# Altium PCB PCB.PcbDoc (part 1 of 3)
Units mm, origin at the board's own origin, x right, y up, seen from the top; angles counter-clockwise.
Board outline 200 x 125 mm, 2 copper layers (Top Layer, Bottom Layer), stack 1.56 mm thick; 156 components, 82 nets, 479 pads, 136 vias.
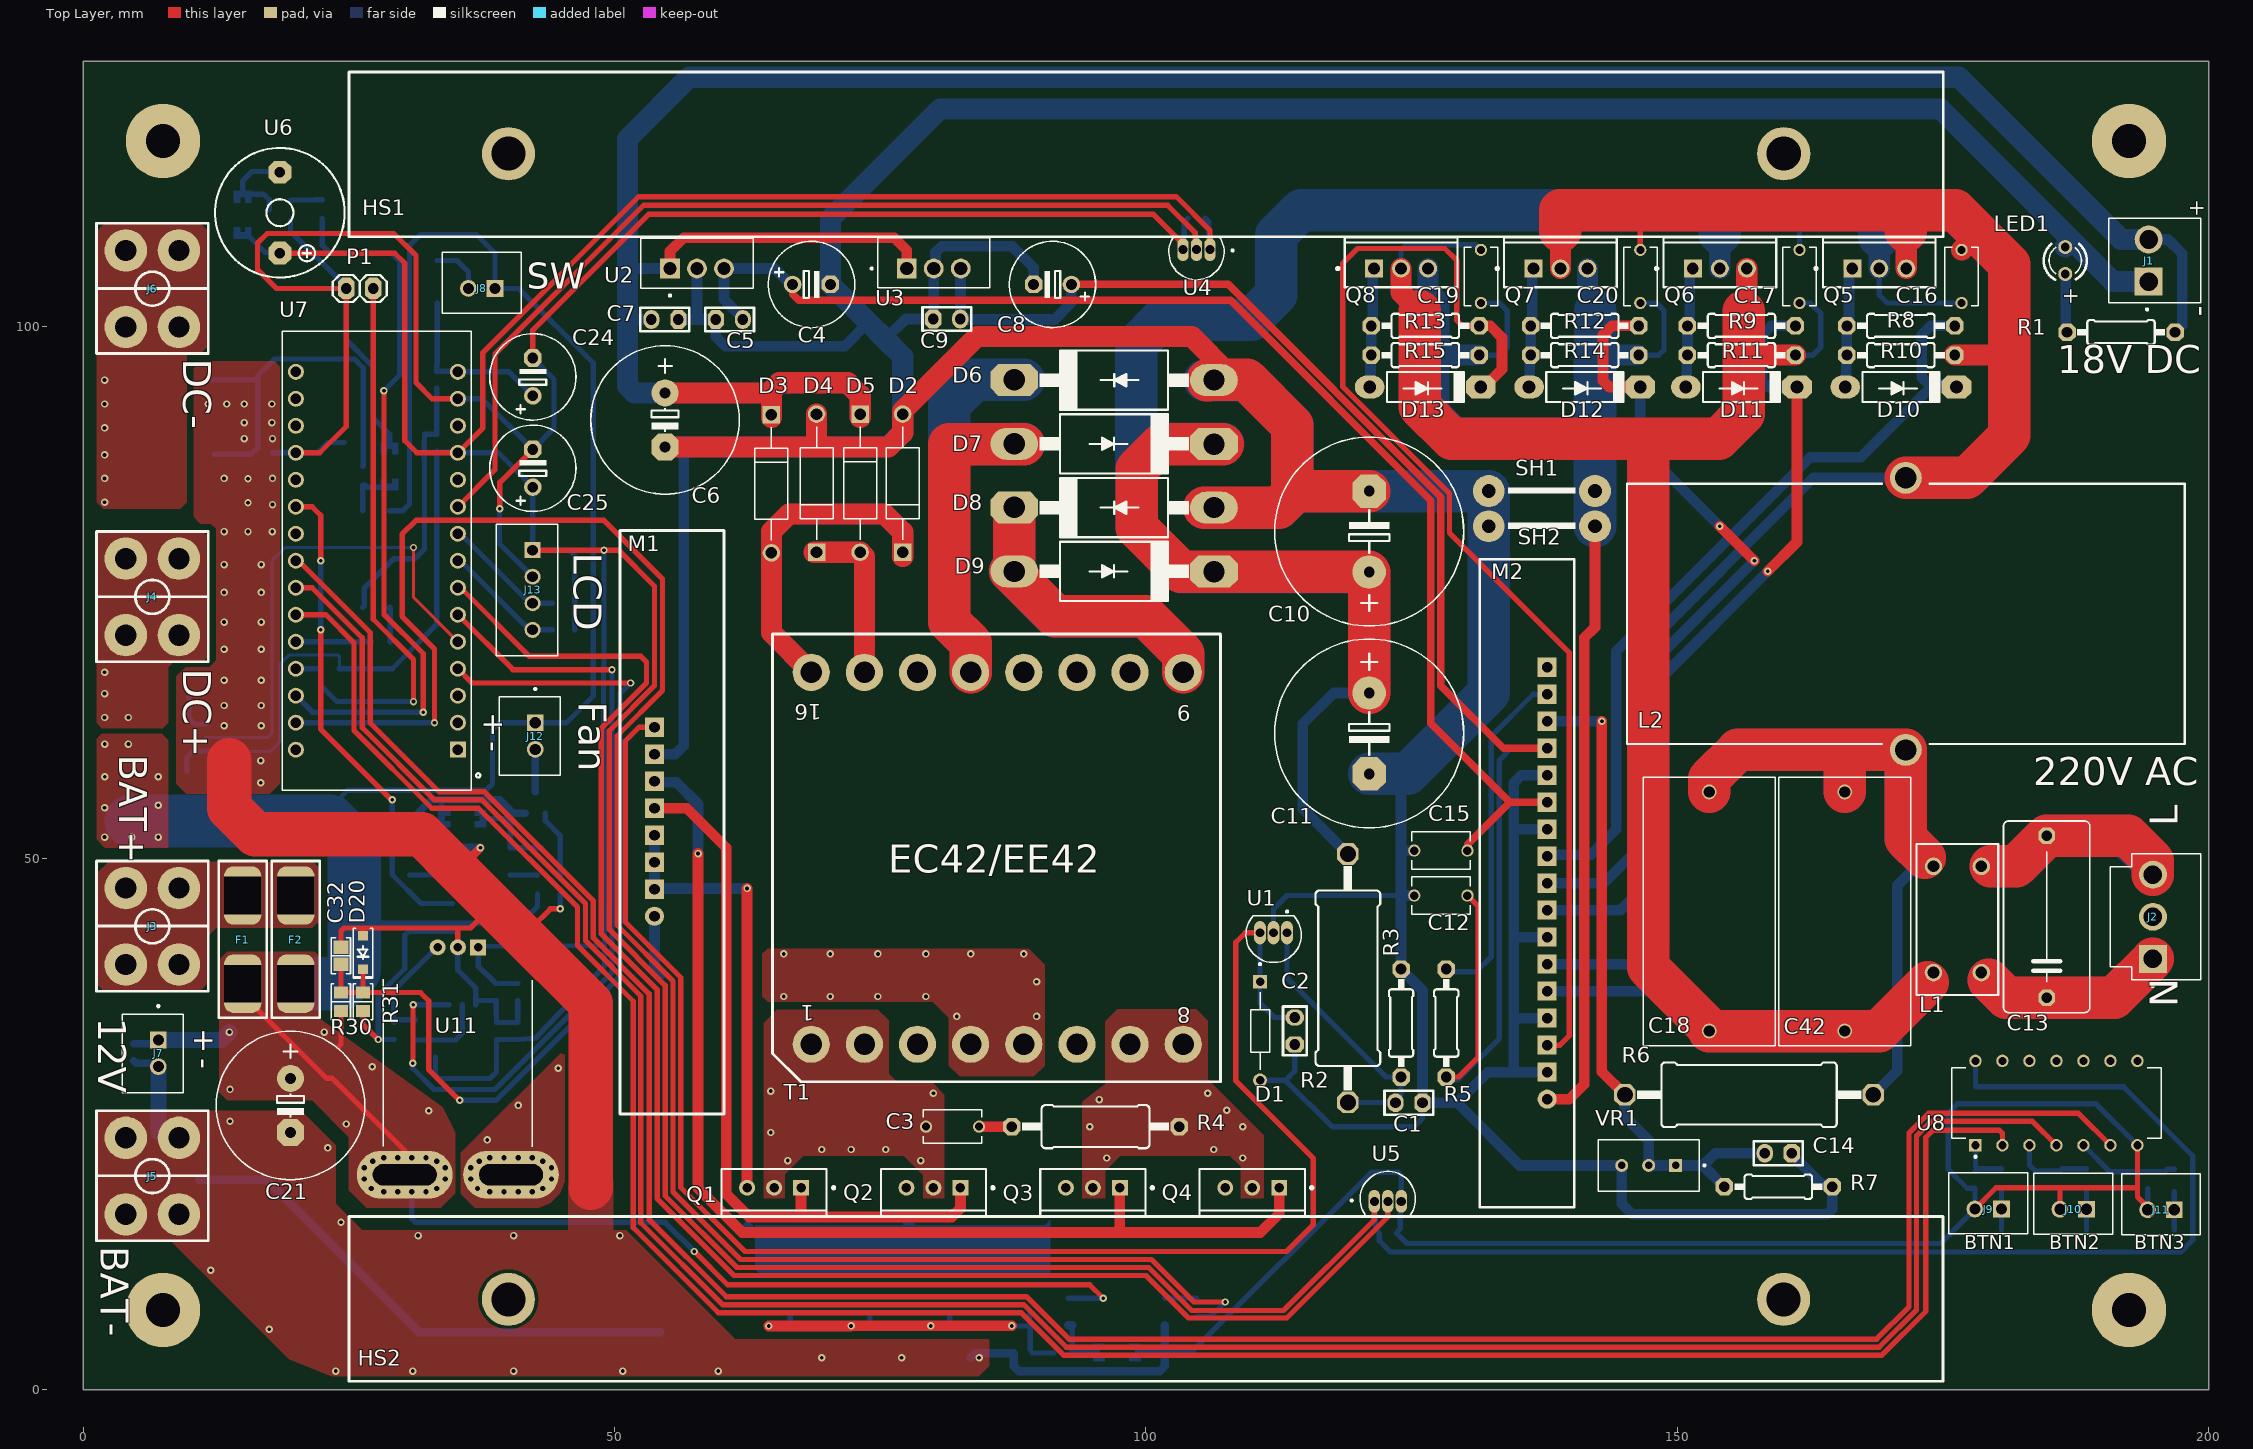
[diagram p0: Top Layer view]
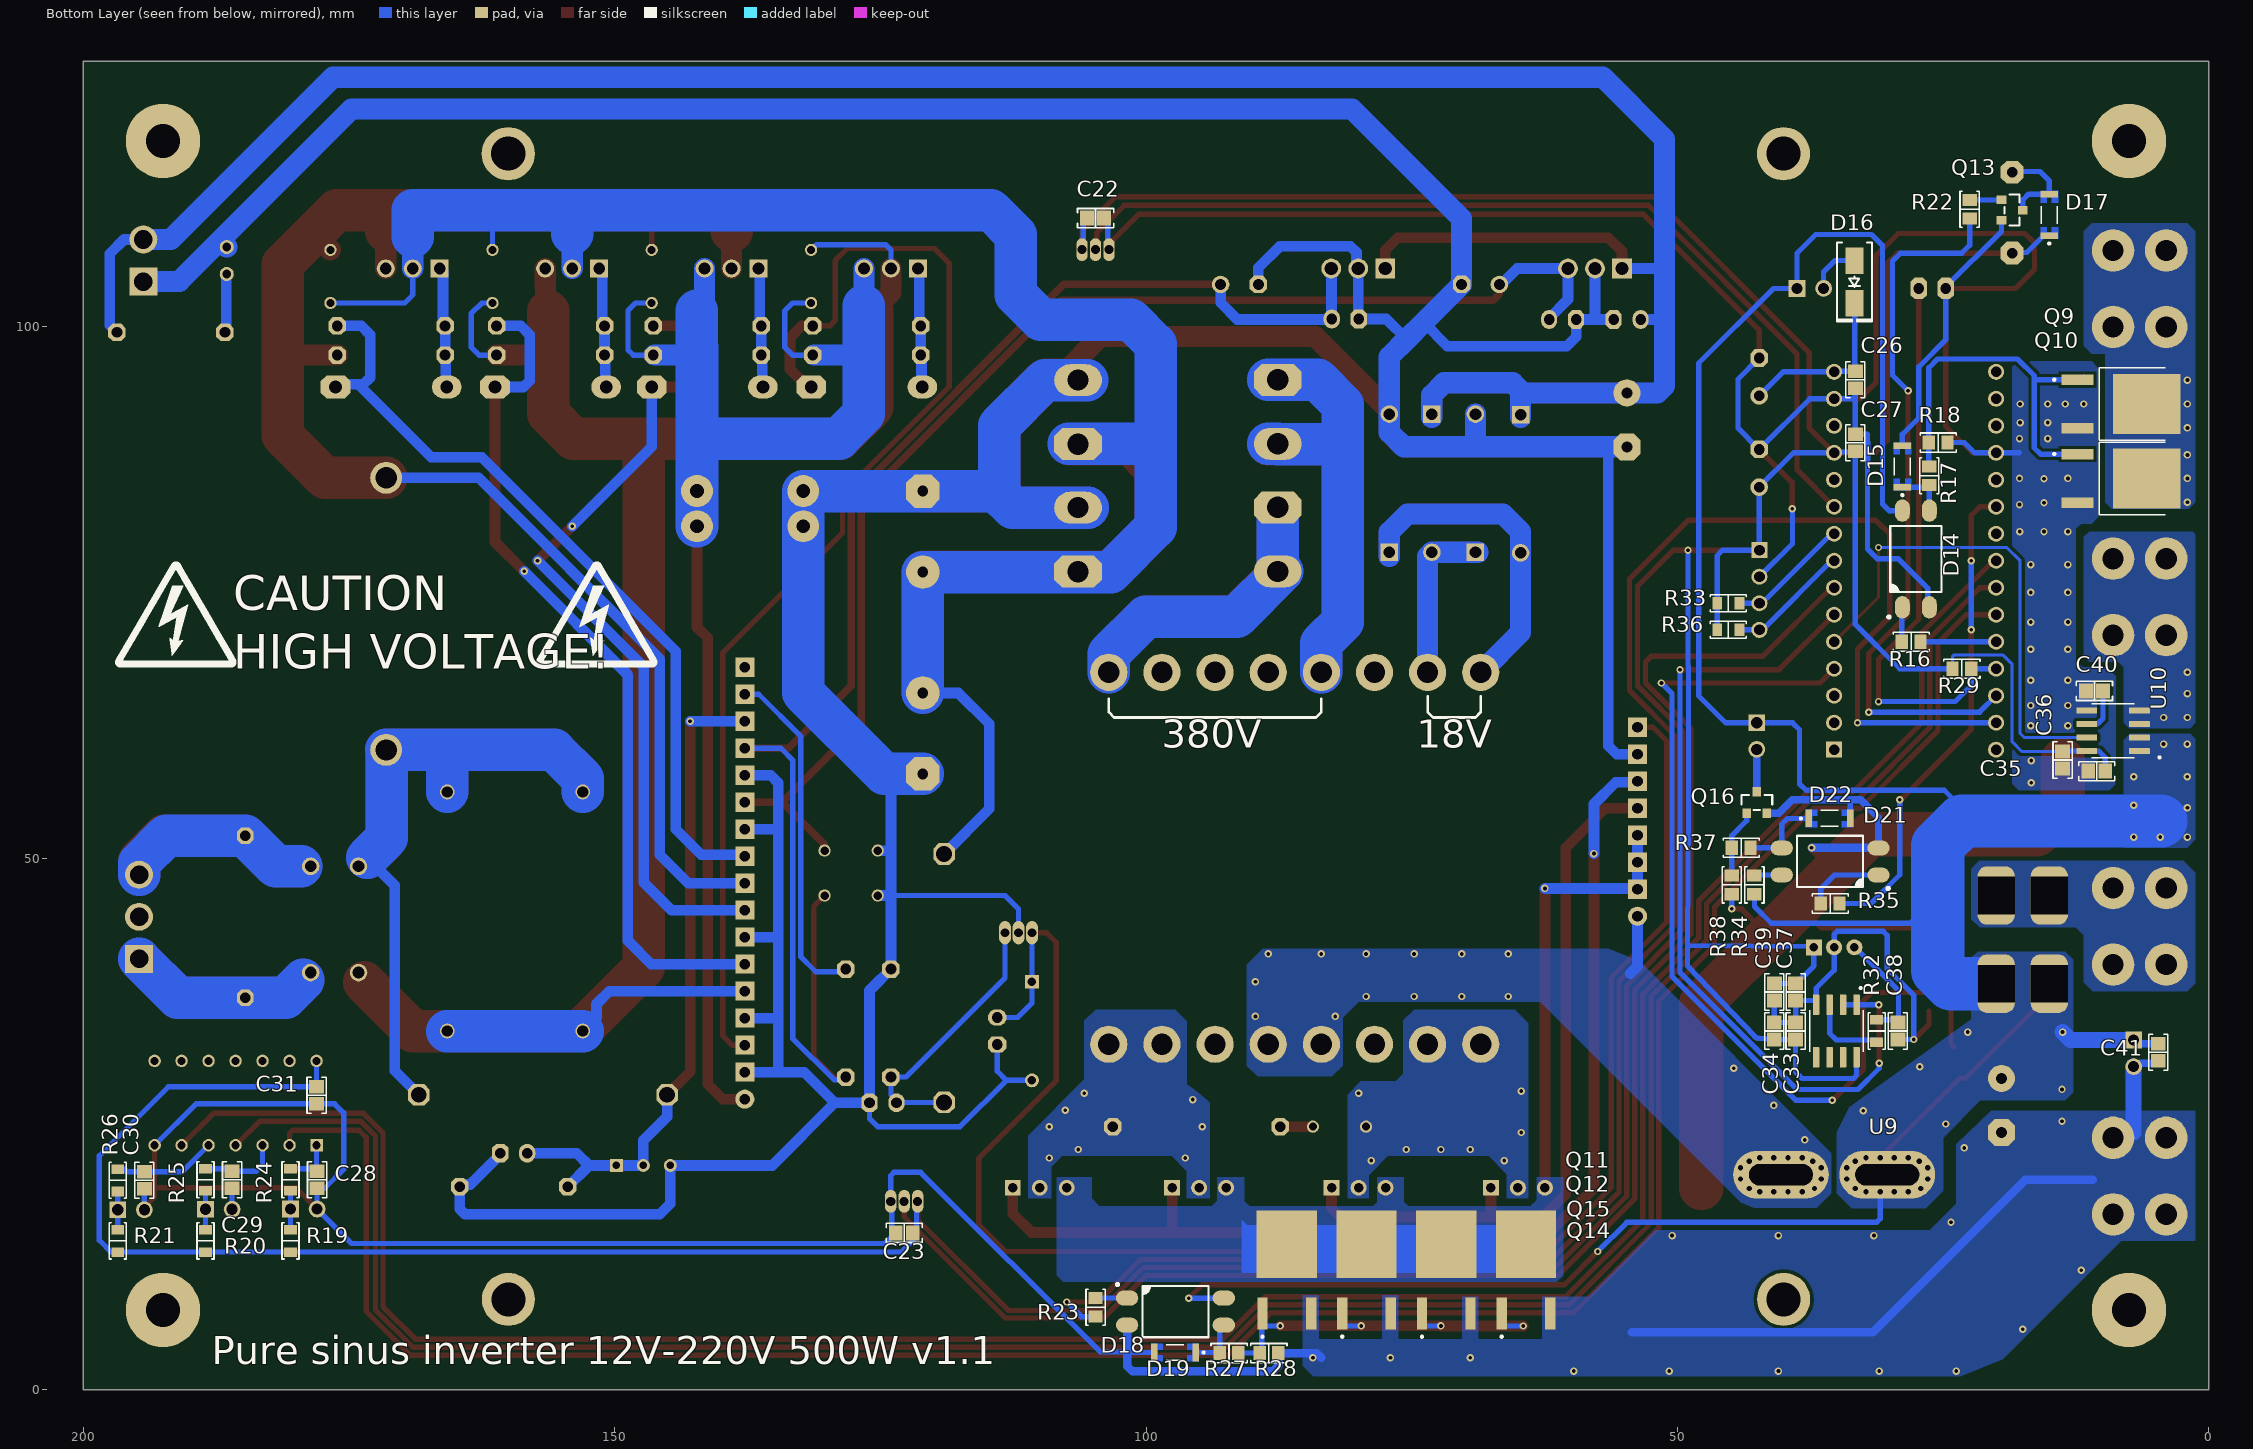
[diagram p1: Bottom Layer view, seen from below]
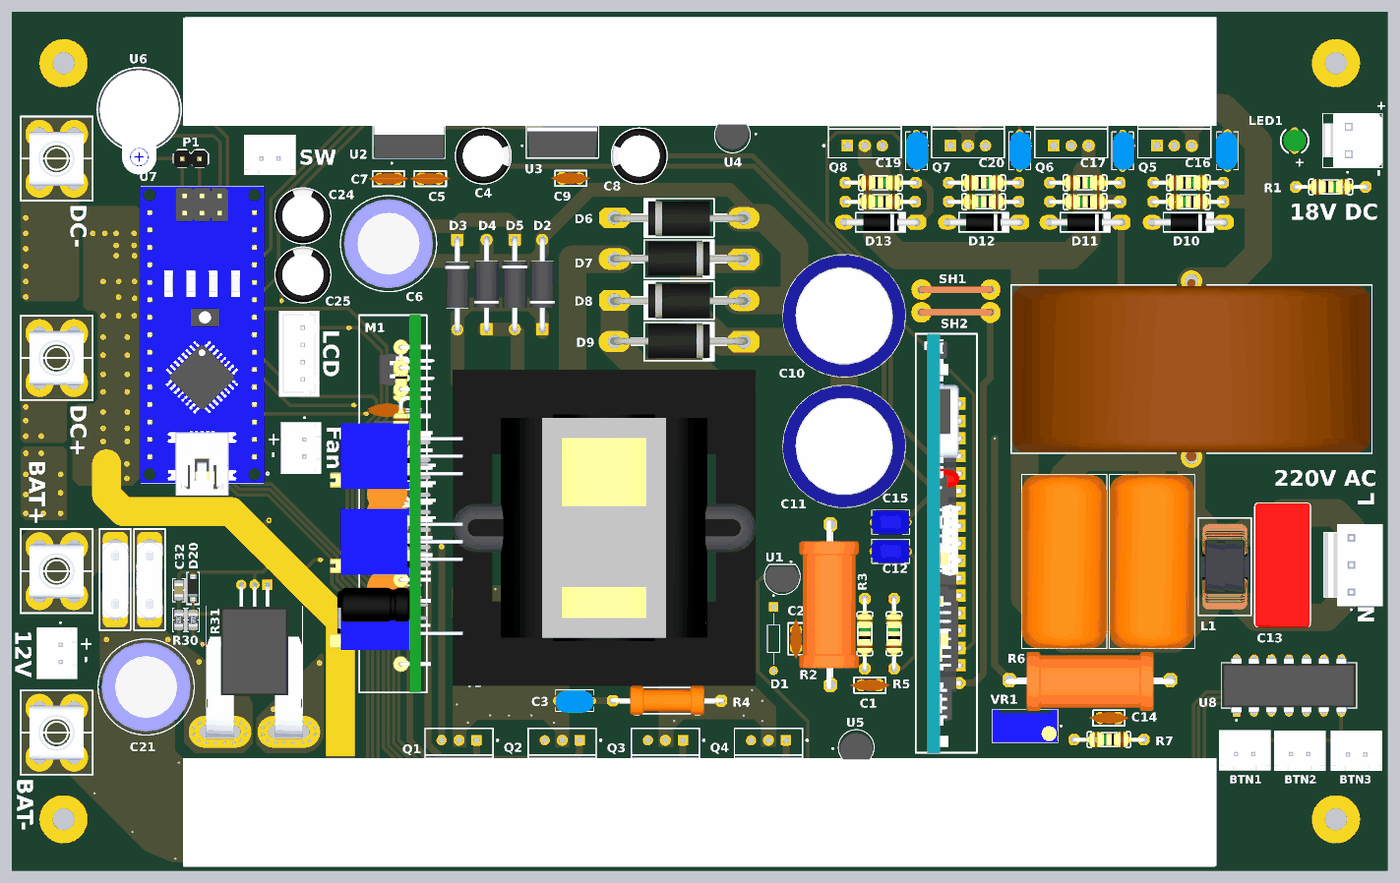
[diagram p3: 3D render of the assembled board from above, using the file's embedded part models]
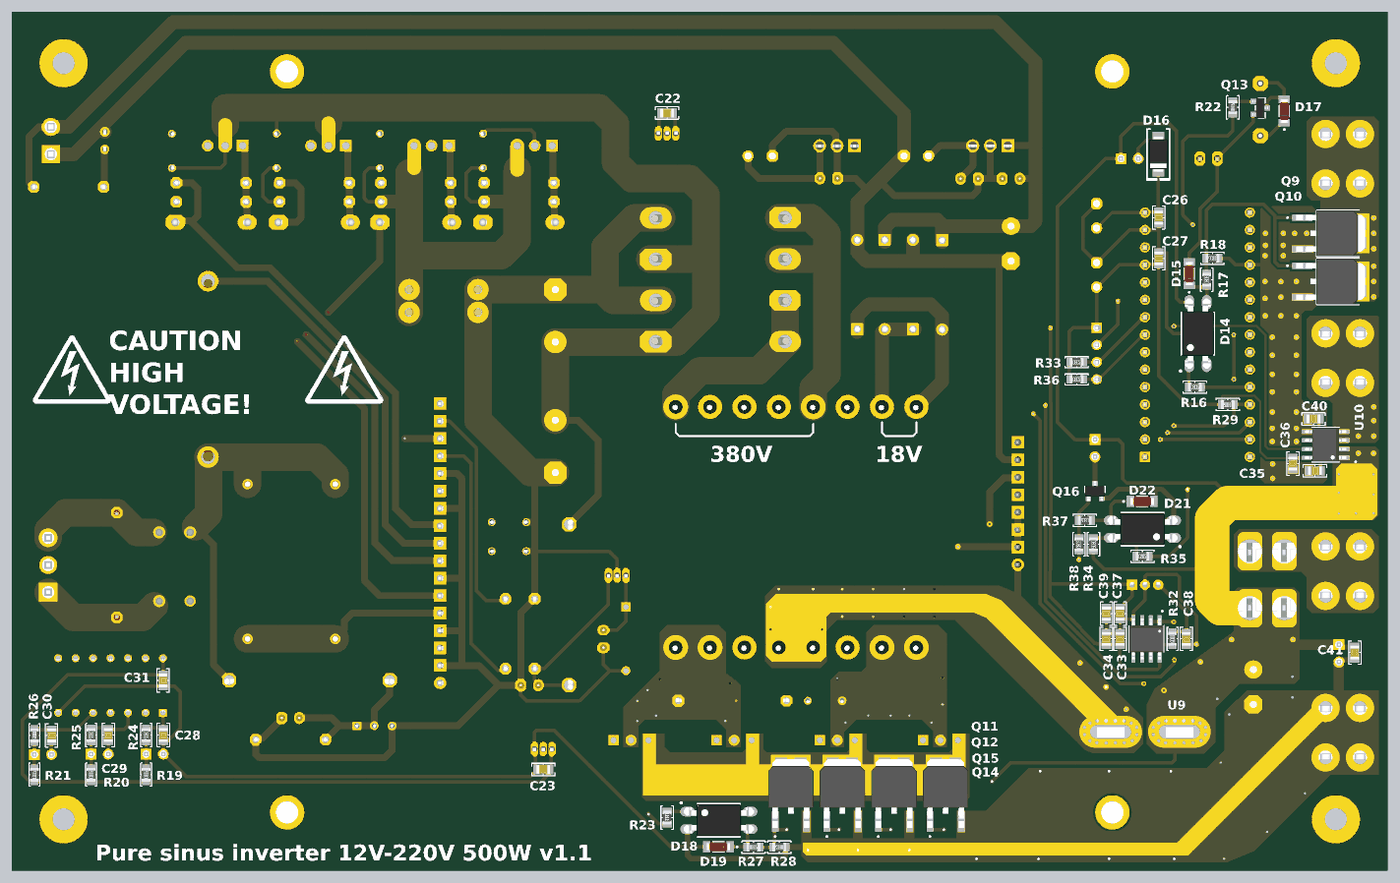
[diagram p4: 3D render of the assembled board from below, using the file's embedded part models]

## Layer stack, top to bottom
Top Solder: solder mask 0.02, Solder Resist, Dk 3.5
Top Layer: signal copper 0.03
Dielectric 1: dielectric 1.5, FR-4, Dk 4.8
Bottom Layer: signal copper 0.03
Bottom Solder: solder mask 0.02, Solder Resist, Dk 3.5

## Board outline
0,0 0,125 200,125 200,0

## Design rules (kind name [scope] priority, off if disabled: settings)
AcuteAngle [All] p1: minimum=6.00000000000000E+0001 checktracksonly=TRUE
AssemblyTestPointUsage [(not InNetClass('NOTESTPOINTS'))] p1: allowmultiple=TRUE
AssemblyTestPointUsage AssemblyTestPointUsageN [InNetClass('NOTESTPOINTS')] p2: valid=2 allowmultiple=TRUE
AssemblyTestpoint [All] p1: testpointundercomponent=TRUE minsize=0.8 maxsize=2 preferedsize=1 minholesize=0 maxholesize=0.35 preferedholesize=0 testpointgrid=1.27 usegrid=FALSE gridoriginx=87.5 gridoriginy=62.5 gridtolerance=0 allowsidetop=TRUE minspacing=2.54 // Zollner
BoardOutlineClearance BoardCopperOutlineClearance [(OnLayer('Top Layer') OR OnLayer('Bottom Layer') )] p1: gap=0.5 ignorepadtopadclearanceinfootprint=FALSE except(1: Poly-OutlineEdge Region-OutlineEdge; 1.5: SMDPad-OutlineEdge THPad-OutlineEdge)
Clearance PadToViaClearance [IsVia and not IsComponentVia vs IsPad] p1: gap=0.025 ignorepadtopadclearanceinfootprint=TRUE
Clearance "Clearance NOTSELV-SELV" [InNetClass('NOTSELV') vs NOT InNetClass('NOTSELV')] p2: gap=6 ignorepadtopadclearanceinfootprint=FALSE // according to previous calio PCB
Clearance "Clearance (FAB)" [All] p3: gap=0.203 ignorepadtopadclearanceinfootprint=TRUE except(0.305: Arc-Poly Track-Poly SMDPad-Poly THPad-Poly Via-Poly Fill-Poly; 0.5: Poly-Poly)
ComponentClearance ComponentClearance_NetTie [((ObjectKind = 'Component') And (ComponentType = 'Net Tie')) Or (Footprint = 'StarPoint') Or (Footprint like 'NetTieVia*')] p1: gap=-3.81 collisioncheckmode=3 verticalgap=-3.81 showdistances=FALSE
ComponentClearance [All] p2: gap=0 collisioncheckmode=3 verticalgap=0 showdistances=FALSE
DiffPairsRouting [All] p1: maxlimit=1.27 minlimit=0.203 mostfreqgap=0.203 toplayer_minwidth=0.152 toplayer_maxwidth=2.54 toplayer_prefwidth=0.254 bottomlayer_minwidth=0.152 bottomlayer_maxwidth=2.54 bottomlayer_prefwidth=0.254 maxuncoupledlength=12.7
FabricationTestPointUsage [All] p1: valid=2 allowmultiple=FALSE
FabricationTestpoint [All] p1: side=3 testpointundercomponent=TRUE minsize=1.016 maxsize=2.54 preferedsize=1.524 minholesize=0 maxholesize=1.016 preferedholesize=0.813 testpointgrid=0.025 allowsidetop=TRUE allowsidebottom=TRUE usegrid=FALSE gridtolerance=0
Height [All] p1: minheight=0 maxheight=65.4 prefheight=12.7
HoleSize [All] p1: absolutevalues=TRUE maxlimit=6.35 minlimit=0.3 maxpercent=80.000 minpercent=20.000 // Zollner
HoleToHoleClearance HoleToHoleClearance_NetTieVia [InPadClass('NetTieVias') vs InPadClass('NetTieVias')] p1: gap=0 allowstackedmicrovias=TRUE
HoleToHoleClearance [All] p2: gap=0.25 allowstackedmicrovias=TRUE // Zollner
MinimumAnnularRing [All] p1: minimumring=0.15 // PCBWAY
MinimumSolderMaskSliver [All] p1: minsoldermaskwidth=0.2 // Zollner
PlaneClearance PlaneClearance_1 [All] p1: clearance=0.508
PlaneConnect [All] p1: pad.planeconnectstyle=Relief pad.reliefexpansion=0.508 pad.reliefentries=4 pad.reliefconductorwidth=0.254 pad.reliefairgap=0.254 via.planeconnectstyle=Direct via.reliefexpansion=0.508 via.reliefentries=4 via.reliefconductorwidth=0.254 via.reliefairgap=0.254
PolygonConnect [All] p1: connectstyle=Direct reliefconductorwidth=0.254 reliefentries=4 polygonreliefangle="90 Angle" airgapwidth=0.254
RoutingVias [All] p1: holewidth=0.35 width=0.7 viastyle="Through Hole" minholewidth=0.3 minwidth=0.6 maxholewidth=1.27 maxwidth=1.27
SMDEntry [not IsTestpoint] p1: side=TRUE corner=TRUE anyangle=FALSE
SMDNeckDown [not IsTestpoint] p1: percent=90.000
SMDToCorner [All] p1: distance=10000
SMDToPlane [All] p1: distance=0
ShortCircuit [All vs not IsBoardCutoutRegion] p1: allowed=FALSE
SilkToSolderMaskClearance [IsPad] p1: minsilkscreentomaskgap=0.127 clearancetoexposedcopper=TRUE
SolderMaskExpansion [All] p1: expansion=0.05 istentingtop=FALSE // Zollner
SolderMaskExpansion SolderMaskExpansionToHoles [All] p2: expansion=0.1 istentingtop=FALSE soldermaskfromhole=TRUE // Zollner
SupplyNets "Schematic Supply Nets_17" [InNet('VIN')] p1: voltage=0.000
SupplyNets "Schematic Supply Nets_16" [InNet('+5_SEC')] p2: voltage=0.000
SupplyNets "Schematic Supply Nets_15" [InNet('18VAC+')] p3: voltage=0.000
SupplyNets "Schematic Supply Nets_14" [InNet('18VAC-')] p4: voltage=0.000
SupplyNets "Schematic Supply Nets_13" [InNet('380VAC+')] p5: voltage=0.000
SupplyNets "Schematic Supply Nets_12" [InNet('+12_SEC')] p6: voltage=0.000
SupplyNets "Schematic Supply Nets_11" [InNet('+5')] p7: voltage=0.000
SupplyNets "Schematic Supply Nets_10" [InNet('SHT')] p8: voltage=0.000
SupplyNets "Schematic Supply Nets_9" [InNet('+18_SEC')] p9: voltage=0.000
SupplyNets "Schematic Supply Nets_8" [InNet('+380_SEC')] p10: voltage=0.000
SupplyNets "Schematic Supply Nets_7" [InNet('GND')] p11: voltage=0.000
SupplyNets "Schematic Supply Nets_6" [InNet('+12')] p12: voltage=0.000
SupplyNets "Schematic Supply Nets_5" [InNet('DC_LOAD_VCC')] p13: voltage=0.000
SupplyNets "Schematic Supply Nets_4" [InNet('380VAC-')] p14: voltage=0.000
SupplyNets "Schematic Supply Nets_3" [InNet('GND_PRI')] p15: voltage=0.000
SupplyNets "Schematic Supply Nets_2" [InNet('GND_SEC')] p16: voltage=0.000
SupplyNets "Schematic Supply Nets_1" [InNet('DC_LOAD_GND')] p17: voltage=0.000
SupplyNets "Schematic Supply Nets" [InNet('+12_PRI')] p18: voltage=0.000
UnRoutedNet [All] p1: checkbadconnections=TRUE
Width [All] p1: maxlimit=12.7 minlimit=0.203 preferedwidth=0.254
15 further rules are at their usual default settings.

## Components (designator, comment, footprint, x,y, rotation, side; value= is the part's Value field where it differs from the comment)
C1 "100nF" My_cap100n 124.75,27 r180 top
C2 "100nF" My_cap100n 114,33.75 r90 top
C3 "10nF 1kV" CAP_RDER73A103K2K1H03B 81.793,24.75 r0 top
C4 "470uF" MY_E3.5-8mm 68.528,104 r0 top
C5 "100nF" My_cap100n 60.8,100.7 r0 top locked
C6 "1000uF" MY_E5-13mm 54.75,91.25 r270 top
C7 "100nF" My_cap100n 54.73,100.7 r180 top locked
C8 "470uF" MY_E3.5-8mm 91.2,104 r180 top
C9 "100nF" My_cap100n 81.25,100.75 r0 top
C10 "100uF" MY_E7.5-18mm 121,80.75 r90 top
C11 "100uF" MY_E7.5-18mm 121,61.75 r270 top
C12 "10uF 25V" CAPRB500W50L550T350H600 127.75,46.5 r0 top
C13 "100nF" MY_E8.4-15mm 184.75,44.5 r90 top
C14 "100nF" My_cap100n 159.5,22.25 r180 top
C15 "10uF 25V" CAPRB500W50L550T350H600 127.75,50.729 r0 top
C16 "1nF 1kV" CAP_RDER73A103K2K1H03B 176.75,104.75 r270 top
C17 "1nF 1kV" CAP_RDER73A103K2K1H03B 161.5,104.75 r90 top
C18 "2.2uF 630V" CAPRR2250W80L2530T1240H1770 153,45 r90 top
C19 "1nF 1kV" CAP_RDER73A103K2K1H03B 131.51,104.75 r90 top
C20 "1nF 1kV" CAP_RDER73A103K2K1H03B 146.51,104.75 r90 top
C21 "2200uF" MY_E5-13mm 19.5,26.75 r270 top
C22 "0.1µF" "CAP 0805_2012" 104.75,110.25 r0 bottom
C23 "0.1µF" "CAP 0805_2012" 122.75,14.75 r180 bottom
C24 "220uF" MY_E3.5-8mm 42.3,95.3 r90 top
C25 "220uF" MY_E3.5-8mm 42.3,86.7 r90 top
C26 "0.1µF" "CAP 0805_2012" 33.25,95.036 r90 bottom
C27 "0.1µF" "CAP 0805_2012" 33.25,89.105 r270 bottom
C28 "0.1µF" "CAP 0805_2012" 178,19.75 r90 bottom
C29 "0.1µF" "CAP 0805_2012" 186,19.75 r90 bottom
C30 "0.1µF" "CAP 0805_2012" 194.25,19.7 r90 bottom
C31 "10µF" "CAP 0805_2012" 178.05,27.7 r90 bottom
C32 "0.1µF" "CAP 0805_2012" 24.249,40.825 r270 top
C33 "10µF" "CAP 0805_2012" 38.881,33.75 r270 bottom
C34 "0.1µF" "CAP 0805_2012" 40.881,33.75 r90 bottom
C35 "0.1µF" "CAP 0805_2012" 10.54,58.2 r180 bottom
C36 "10µF" "CAP 0805_2012" 13.75,59.25 r270 bottom
C37 "0.1µF" "CAP 0805_2012" 38.87,37.422 r90 bottom
C38 "100 pF" "CAP 0805_2012" 29.25,33.75 r90 bottom
C39 "10µF" "CAP 0805_2012" 40.87,37.422 r270 bottom
C40 "1000 pF" "CAP 0805_2012" 10.75,65.75 r180 bottom
C41 "0.1µF" "CAP 0805_2012" 4.75,31.75 r90 bottom
C42 "2.2uF 630V" CAPRR2250W80L2530T1240H1770 165.75,45 r90 top
D1 "BZX55B20_R0G" DIOAD928W47L399D179 110.729,33.75 r270 top
D2 "HER207G" DIOAD1300W80L670D310 77.1,85.3 r90 top
D3 "HER207G" DIOAD1300W80L670D310 64.75,85.25 r270 top
D4 "HER207G" DIOAD1300W80L670D310 69,85.3 r90 top
D5 "HER207G" DIOAD1300W80L670D310 73.1,85.3 r270 top
D6 "MUR460" My_DO201-15 97,95 r0 top
D7 "MUR460" My_DO201-15 97,89 r180 top
D8 "MUR460" My_DO201-15 97,83 r0 top
D9 "MUR460" My_DO201-15 97,77 r180 top
D10 "1N4148" My_DO41 171,94.25 r180 top
D11 "1N4148" My_DO41 156,94.25 r180 top
D12 "1N4148" My_DO41 141.25,94.25 r180 top
D13 "1N4148" My_DO41 126.25,94.25 r180 top
D14 "LTV-817S-TA" "LITEON LTV-817" 27.557,78.17 r90 bottom
D15 "LL4148" DIO_LL4148 28.827,86.875 r90 bottom
D16 "SS23-TP" "DO214AC SMA" 33.323,104.25 r270 bottom
D17 "LL4148" DIO_LL4148 15,110.55 r90 bottom
D18 "LTV-817S-TA" "LITEON LTV-817" 97.225,7.35 r180 bottom
D19 "LL4148" DIO_LL4148 97.279,3.5 r0 bottom
D20 "MMSZ5231CT1G" SOD-123 26.323,41.137 r270 top
D21 "LTV-817S-TA" "LITEON LTV-817" 35.625,49.705 r0 bottom
D22 "LL4148" DIO_LL4148 35.675,53.75 r180 bottom
F1 "25A" "Mini Car Blade Fuse" 15,46.5 r180 top
F2 "25A" "Mini Car Blade Fuse" 20,46.5 r180 top
HS1 "HSINK-150-20-16MM" HSINK-150-20-16MM 25.011,108.5 r0 top locked
HS2 "HSINK-150-20-16MM" HSINK-150-20-16MM 175,16.3 r180 top locked
J1 "18V" VALCON_VH396-02S-010 194.35,106.25 r90 top
J2 "220 VAC" JST_B3P-VH(LF)(SN) 194.75,44.5 r90 top
J3 "BATT +" "Keystone 7767" 4,40 r0 top locked
J4 "DC +" "Keystone 7767" 4,71 r0 top locked
J5 "BATT -" "Keystone 7767" 4,16.5 r0 top locked
J6 "DC -" "Keystone 7767" 4,100 r0 top locked
J7 "Out 12V" JST_B2B-XH-A(LF)(SN) 6.538,31.65 r90 top
J8 "On/Off Switch" JST_B2B-XH-A(LF)(SN) 37.491,104.15 r0 top
J9 "Invertor On/Off" JST_B2B-XH-A(LF)(SN) 179.25,17.525 r0 top
J10 "DC Load On/Off" JST_B2B-XH-A(LF)(SN) 187.25,17.5 r0 top
J11 "LCD On/Off" JST_B2B-XH-A(LF)(SN) 195.5,17.45 r0 top
J12 "Fan" JST_B2B-XH-A(LF)(SN) 42,61.5 r90 top locked
J13 "LCD" JST_B4B-XH-AM_(LF)(SN) 41.75,75.25 r90 top locked
L1 "2mH" WE-CMBNC_XS_7448010911 176.35,44.25 r270 top
L2 "2mH" 184125 171.5,73 r0 top
LED1 "" LED3MM 186.5,106.25 r90 top
M1 "TL494 PWM Module" TL494-PWM-MODULE 53.75,53.44 r180 top
M2 "EGS002" EGS002 137.75,40.04 r180 top locked
P1 "Debug EN" My_1X02 27.29,103.625 r0 top
Q1 "IRF3205PBF" INF-PG-TO-220AB 65,19 r270 top locked
Q2 "IRF3205PBF" INF-PG-TO-220AB 80,19 r270 top locked
Q3 "IRF3205PBF" INF-PG-TO-220AB 95,19 r270 top locked
Q4 "IRF3205PBF" INF-PG-TO-220AB 110,19 r270 top locked
Q5 "IRF840PBF" VISH-TO-220AB-3 169,105.5 r90 top locked
Q6 "IRF840PBF" VISH-TO-220AB-3 154,105.5 r90 top locked
Q7 "IRF840PBF" VISH-TO-220AB-3 139,105.5 r90 top locked
Q8 "IRF840PBF" VISH-TO-220AB-3 124,105.5 r90 top locked
Q9 "AOD4184A" DPAK228P994X240-4N 8.275,92.75 r270 bottom
Q10 "AOD4184A" DPAK228P994X240-4N 8.275,85.75 r270 bottom
Q11 "AOD4184A" DPAK228P994X240-4N 64.25,11.25 r180 bottom
Q12 "AOD4184A" DPAK228P994X240-4N 71.75,11.25 r180 bottom
Q13 "MMSS8050-L-TP" "MCCSEMI SOT-23-3" 18.5,111 r180 bottom
Q14 "AOD4184A" DPAK228P994X240-4N 86.75,11.25 r180 bottom
Q15 "AOD4184A" DPAK228P994X240-4N 79.25,11.25 r180 bottom
Q16 "DMG3406L-7" "DIODES SOT-23-3" 42.525,55.25 r90 bottom
R1 "2.2 kOhms" MY_(0.25w)_0207_10 191.75,99.5 r0 top
R2 "200 kOhms" MY_(2w)_0617_22 119,38.719 r270 top
R3 "3.3 kOhms" MY_(0.25w)_0207_10 124,34.5 r90 top
R4 "4.7 Ohms" MY_(0.5w)_0411_15 95.25,24.75 r0 top
R5 "10 kOhms" MY_(0.25w)_0207_10 128.25,34.5 r90 top
R6 "200 kOhms" MY_(2w)_0617_22 156.75,27.75 r0 top
R7 "10 kOhms" MY_(0.25w)_0207_10 159.5,19.1 r180 top
R8 "22 Ohms" MY_(0.25w)_0207_10 171.03,100.1 r0 top
R9 "22 Ohms" MY_(0.25w)_0207_10 156.03,100.1 r0 top
R10 "5.6 kOhms" MY_(0.25w)_0207_10 171.03,97.35 r180 top
R11 "5.6 kOhms" MY_(0.25w)_0207_10 156.03,97.35 r180 top
R12 "22 Ohms" MY_(0.25w)_0207_10 141.28,100.1 r0 top
R13 "22 Ohms" MY_(0.25w)_0207_10 126.28,100.1 r0 top
R14 "5.6 kOhms" MY_(0.25w)_0207_10 141.28,97.35 r180 top
R15 "5.6 kOhms" MY_(0.25w)_0207_10 126.28,97.35 r180 top
R16 "1 kOhms" "RES 0805_2012" 28.002,70.38 r180 bottom
R17 "100 Ohms" "RES 0805_2012" 26.287,86 r90 bottom
R18 "4.7 kOhms" "RES 0805_2012" 25.46,89.125 r0 bottom
R19 "10 kOhms" "YAGEO RES 0805_2012" 180.5,14 r90 bottom
R20 "10 kOhms" "YAGEO RES 0805_2012" 188.5,14 r90 bottom
R21 "10 kOhms" "YAGEO RES 0805_2012" 196.75,14 r90 bottom
R22 "10 kOhms" "RES 0805_2012" 22.5,111.082 r90 bottom
R23 "1 kOhms" "RES 0805_2012" 104.75,7.75 r270 bottom
R24 "10 kOhms" "YAGEO RES 0805_2012" 180.5,19.75 r270 bottom
R25 "10 kOhms" "YAGEO RES 0805_2012" 188.5,19.75 r270 bottom
R26 "10 kOhms" "YAGEO RES 0805_2012" 196.75,19.7 r270 bottom
R27 "100 Ohms" "RES 0805_2012" 92.186,3.45 r180 bottom
R28 "4.7 kOhms" "RES 0805_2012" 88.431,3.45 r0 bottom
R29 "10 kOhms" "RES 0805_2012" 23.222,67.84 r0 bottom
R30 "30 kOhms" "RES 0805_2012" 24.249,36.5 r270 top
R31 "7.5 kOhms" "RES 0805_2012" 26.323,36.5 r90 top
R32 "120 Ohms" "YAGEO RES 0805_2012" 31.25,33.75 r270 bottom
R33 "10 kOhms" "YAGEO RES 0805_2012" 45.2,74 r180 bottom
R34 "4.7 kOhms" "RES 0805_2012" 42.75,47.5 r270 bottom
R35 "1 kOhms" "RES 0805_2012" 35.625,45.75 r180 bottom
R36 "10 kOhms" "YAGEO RES 0805_2012" 45.2,71.5 r180 bottom
R37 "100 Ohms" "RES 0805_2012" 44,51 r0 bottom
R38 "4.7 kOhms" "RES 0805_2012" 44.875,47.5 r90 bottom
SH1 "20 mOhms" WIRE-SHUNT 137.25,84.56 r0 top
SH2 "20 mOhms" WIRE-SHUNT 137.25,81.25 r0 top
T1 "EC42/EE42" EC42/EE42 86,50 r90 top locked
U1 "TL431ILPG" TO92127P520H660-3 112,42.388 r180 top
U2 "LM7812CT" TO254P1054X470X1955-3 57.75,105.5 r0 top
U3 "LM7805CT" TO254P1054X470X2600-3 77.49,105.5 r0 top
U4 "LM35DZ TO-92" TO92127P521H735-3 104.75,106.5 r180 top
U5 "LM35DZ TO-92" TO92127P521H735-3 122.75,18.5 r0 top
U6 "Buzzer small" My_Buzzer 18.5,110.75 r270 top
U7 "Arduino Nano" MODULE_ARDUINO_NANO_A000005 27.63,78 r180 top locked
U8 "CD74HC14E" DIP794W45P254L1969H508Q14 185.67,26.97 r90 top
U9 "TLC2272QDR" SOIC127P599X175-8N 35.04,33.75 r270 bottom
U10 "ACS712ELCTR30AT" SOIC127P600X175-8N 9,62 r0 bottom
U11 "ACS758" XDCR_ACS758 35.25,41.625 r180 top locked
VR1 "10k" TRIM_3296W-1-502 147.3,21.1 r180 top

## Footprints (in the part's own frame and the unit in brackets; to place one, negate y for a bottom-side part, rotate by r counter-clockwise, add the part's x,y. Pads: shape width x height; smd on the part's side, far side on the other; paste and mask are expansions set on the pad)
184125 [mm] "Leaded Toroidal Line Choke, 2-leads, body 52.5x24.5mm"
  round 3 hole 2: 1(0,12.8) 2(0,-12.8)
  silkscreen extent -26.25,-12.25 26.25,12.25, body extent -26.03,-13.43 25.97,13.08, height 52
"CAP 0805_2012" [mm] "Chip Capacitor, 2-Leads, Body 2.00x1.20mm, IPC Medium Density"
  rect 1.3x1.4 smd: 1(-0.8,0) 2(0.8,0)
  silkscreen extent -1.7,-0.9 1.7,0.9, body extent -1,-0.64 1,0.64, height 1.26
CAP_RDER73A103K2K1H03B [mm]
  round 1.15 hole 0.75: 1(-2.5,0) 2(2.5,0)
  silkscreen extent -2.75,-1.58 2.75,1.58, body extent -2.75,-1.7 2.75,1.45, height 8.54
CAPRB500W50L550T350H600 [mm]
  round 1.15 hole 0.8: 1(-2.5,0) 2(2.5,0)
  silkscreen extent -2.75,-1.75 2.75,1.75, body extent -2.75,-1.75 2.75,1.75, height 6
CAPRR2250W80L2530T1240H1770 [mm]
  round 1.4 hole 1.05: 1(-11.25,0) 2(11.25,0)
  silkscreen extent -12.65,-6.2 12.65,6.2, body extent -12.65,-6.2 12.65,6.2, height 20.2
DIO_LL4148 [mm]
  rect 0.6x1.65 smd: A(1.95,0) C(-1.95,0)
  Top Layer region: -1.15,0.25 -1.65,0.25 -1.65,-0.25 -1.15,-0.25 -1.15,-0.825 -2.24,-0.825 -2.24,0.825 -1.15,0.825
  Top Layer region: 2.25,-0.825 1.15,-0.825 1.15,-0.25 1.65,-0.25 1.65,0.25 1.15,0.25 1.15,0.825 2.25,0.825
  silkscreen extent -2.8,-0.75 0.83,0.75, body extent -1.7,-0.7 1.7,0.7, height 1.4
DIOAD928W47L399D179 [mm]
  round 1.308 hole 0.8: A(4.64,0)
  rect 1.308x1.308 / inner round 1.308 / far side rect 1.308x1.308 hole 0.8: C(-4.64,0)
  silkscreen extent -6.39,-0.89 3.67,0.89
DIOAD1300W80L670D310 [mm]
  round 1.65 hole 1.1: A(6.5,0)
  rect 1.65x1.65 hole 1.1: C(-6.5,0)
  silkscreen extent -5.32,-1.55 5.32,1.55, body extent -6.9,-1.8 6.9,1.8, height 3.6
"DIODES SOT-23-3" [mm] "SOT23, 3-Leads, Body 2.90x2.40mm, Pitch 0.95mm, IPC Medium Density"
  rect 0.9x0.8 smd: 1(-1,0.95) 2(-1,-0.95) 3(1,0)
  silkscreen extent -0.7,-1.45 0.7,1.45, body extent -1.41,-1.45 1.41,1.45, height 1.5
DIP794W45P254L1969H508Q14 [mm]
  rect 1.17x1.17 / inner round 1.17 / far side rect 1.17x1.17 hole 0.77: 1(-3.97,7.62)
  round 1.17 hole 0.77: 2(-3.97,5.08) 3(-3.97,2.54) 4(-3.97,0) 5(-3.97,-2.54) 6(-3.97,-5.08) 7(-3.97,-7.62) 8(3.97,-7.62) 9(3.97,-5.08) 10(3.97,-2.54) 11(3.97,0) 12(3.97,2.54) 13(3.97,5.08) 14(3.97,7.62)
  silkscreen extent -5.15,-9.84 3.3,9.84, body extent -3.94,-9.65 3.94,9.65, height 5.08
"DO214AC SMA" [mm] "Molded Diode, 2-Leads, Body 4.30x2.60mm, IPC Medium Density"
  rect 2.5x1.7 smd: 1(-2,0) 2(2,0)
  silkscreen extent -3.68,-1.65 3.75,1.65, body extent -2.6,-1.37 2.6,1.37, height 2.4
DPAK228P994X240-4N [mm]
  rect 0.97x3.02 smd: 1(-2.286,-4.09) 3(2.286,-4.09)
  rect 5.67x6.32 smd paste-4: 4(0,2.44)
  silkscreen extent -3.4,-6.36 3.4,4.18, body extent -3.3,-5.02 3.3,5.02, height 2.4
EC42/EE42 [mm] "EC42-20 High Frequency Transformer 43x43x15mm (L*W*H)"
  round 3.5 hole 2: 1(-17.5,17.5) 2(-17.5,12.5) 3(-17.5,7.5) 4(-17.5,2.5) 5(-17.5,-2.5) 6(-17.5,-7.5) 7(-17.5,-12.5) 8(-17.5,-17.5) 9(17.5,-17.5) 10(17.5,-12.5) 11(17.5,-7.5) 12(17.5,-2.5) 13(17.5,2.5) 14(17.5,7.5) 15(17.5,12.5) 16(17.5,17.5)
  silkscreen extent -21.02,-21.01 21.1,21.15, body extent -23.1,-22.2 22.9,22, height 27.85
EGS002 [mm]
  round 1.8 hole 1: 1(0,12.7)
  rect 1.8x1.8 / inner round 1.8 / far side rect 1.8x1.8 hole 1: 2(0,10.16) 3(0,7.62) 4(0,5.08) 5(0,2.54) 6(0,0) 7(0,-2.54) 8(0,-5.08) 9(0,-7.62) 10(0,-10.16) 11(0,-12.7) 12(0,-15.24) 13(0,-17.78) 14(0,-20.32) 15(0,-22.86) 16(0,-25.4) 17(0,-27.94)
  silkscreen extent -2.54,-38.1 6.35,22.86, body extent -0.4,-38.1 4.7,22.9, height 32.25
HSINK-150-20-16MM [mm] "Heat Sink Cooler Radiator"
  round 5 hole 3.2: 1(15,7.8) 1(135,7.8)
  silkscreen extent 0,0 150,15.5, body extent 0.1,0.1 150.1,15.7, height 19.85
INF-PG-TO-220AB [mm] "FM, 3-Leads, Body 9.9x4.4mm, Pitch 2.54mm"
  rect 1.5x1.5 hole 0.9: 1(0,2.54)
  round 1.5 hole 0.9: 2(0,0) 3(0,-2.54)
  silkscreen extent -1.75,-4.95 2.65,5.72, body extent -1.75,-4.95 2.65,4.95, height 20.2
JST_B2B-XH-A(LF)(SN) [mm]
  rect 1.575x1.575 / inner round 1.575 / far side rect 1.575x1.575 hole 1.05: 1(1.25,-0.525)
  round 1.575 hole 1.05: 2(-1.25,-0.525)
  silkscreen extent -3.7,-2.88 4.54,2.88, body extent -3.7,-2.88 3.7,2.88, height 7
JST_B3P-VH(LF)(SN) [mm]
  rect 2.625x2.625 / inner round 2.625 / far side rect 2.625x2.625 hole 1.75: 1(-3.96,0)
  round 2.625 hole 1.75: 2(0,0) 3(3.96,0)
  silkscreen extent -6.6,-4.5 5.91,4, body extent -5.91,-4.5 5.91,4, height 10.9
JST_B4B-XH-AM_(LF)(SN) [mm]
  rect 1.508x1.508 / inner round 1.508 / far side rect 1.508x1.508 hole 1: 1(3.75,-0.525)
  round 1.508 hole 1: 2(1.25,-0.525) 3(-1.25,-0.525) 4(-3.75,-0.525)
  silkscreen extent -6.2,-2.88 6.2,2.88, body extent -6.2,-2.88 6.2,2.88, height 7
"Keystone 7767" [mm] "Riveting Nut Terminal 8*8*6.8MM M4"
  round 4 hole 2 mask+0.05: 1(0,0) 1(0,7.2) 1(5,7.2) 1(5,0)
  silkscreen extent -2.75,-2.5 7.75,9.75, body extent -1.46,-0.34 6.41,7.54, height 7.18
LED3MM [mil]
  round 52 hole 32: A(-50,0) K(50,0)
  silkscreen extent -71,-80 61,80, body extent -63,-63 63,63, height 240
"LITEON LTV-817" [mm] "SOP, 4-Leads, Body 4.60x6.50mm, Pitch 2.54mm, IPC Medium Density"
  oval 2.1x1.4 smd: 1(-4.55,1.27) 2(-4.55,-1.27) 3(4.55,-1.27) 4(4.55,1.27)
  silkscreen extent -5.59,-2.41 3.1,2.67, body extent -5.1,-2.3 5.1,2.3, height 3.85
"MCCSEMI SOT-23-3" [mm] "SOT23, 3-Leads, Body 2.92x2.37mm, Pitch 0.95mm, IPC Medium Density"
  rect 0.9x0.8 smd: 1(-1,0.95) 2(-1,-0.95) 3(1,0)
  silkscreen extent -0.7,-1.45 0.7,1.45, body extent -1.16,-1.45 1.16,1.45, height 1.5
"Mini Car Blade Fuse" [mm] "Low Profile Small Blade Fuse"
  rrect50% 3.5x5.5 hole 3.5 square mask+0.05: 1(0,0) 2(0,8.3)
  silkscreen extent -2.25,-3.25 2.25,11.5, body extent -1.91,-1.25 1.9,9.65, height 10.8
MODULE_ARDUINO_NANO_A000005 [mm]
  rect 1.508x1.508 / inner round 1.508 / far side rect 1.508x1.508 hole 1: 1(-7.62,17.78)
  round 1.508 hole 1: 2(-7.62,15.24) 3(-7.62,12.7) 4(-7.62,10.16) 5(-7.62,7.62) 6(-7.62,5.08) 7(-7.62,2.54) 8(-7.62,0) 9(-7.62,-2.54) 10(-7.62,-5.08) 11(-7.62,-7.62) 12(-7.62,-10.16) 13(-7.62,-12.7) 14(-7.62,-15.24) 15(-7.62,-17.78) 16(7.62,-17.78) 17(7.62,-15.24) 18(7.62,-12.7) 19(7.62,-10.16) 20(7.62,-7.62) 21(7.62,-5.08) 22(7.62,-2.54) 23(7.62,0) 24(7.62,2.54) 25(7.62,5.08) 26(7.62,7.62) 27(7.62,10.16) 28(7.62,12.7) 29(7.62,15.24) 30(7.62,17.78)
  silkscreen extent -9.73,-21.59 8.89,21.59, body extent -9,-21.6 9,23.4, height 12.6
My_1X02 [mil]
  oct 60x80 hole 39.37: 1(-100,0) 2(0,0)
  silkscreen extent -150,-50 50,50, body extent -150,-51 46,47, height 323
MY_(0.5w)_0411_15 [mil]
  oct 65x65 hole 40: 1(-310,0) 2(310,0)
  silkscreen extent -273,-80 273,80, body extent -327,-80 327,85, height 168
MY_(0.25w)_0207_10 [mil]
  oct 65x65 hole 40: 1(-200,0) 2(200,0)
  silkscreen extent -163,-45 163,45, body extent -212,-45 212,46, height 96
MY_(2w)_0617_22 [mil]
  oct 80x80 hole 59.06: 1(-460,0) 2(460,0)
  silkscreen extent -416,-120 416,120, body extent -488,-177 488,162, height 349
My_Buzzer [mil]
  oct 85x85 hole 39.37: +(150,0) -(-150,0)
  silkscreen extent -240,-240 240,240, body extent -236,-236 372,236, height 381
My_cap100n [mil]
  oct 60x70 hole 39.37: 1(-50,0)
  oval 60x70 hole 39.37: 2(50,0)
  silkscreen extent -90,-44 91,44, body extent -115,-33 115,33, height 245
My_DO41 [mil]
  oval 110x85 hole 47.24: A(204.71,-4)
  oct 110x85 hole 47.24: K(-207.1,-4)
  silkscreen extent -148,-59 141,51, body extent -228,-53 228,45, height 104
My_DO201-15 [mm]
  oval 4.496x3 hole 2: A(9.398,0)
  oct 4.496x3 hole 2: K(-9.398,0.025)
  silkscreen extent -7.04,-2.79 7.04,2.8, body extent -10.02,-2.59 10.02,2.42, height 5.04
MY_E3.5-8mm [mil]
  round 65 hole 40: +(-70,0)
  oct 65x65 hole 40: -(70,0)
  silkscreen extent -160,-160 160,160, body extent -157,-157 157,157, height 415
MY_E5-13mm [mil]
  round 100 hole 40: +(-100,0)
  oct 100x100 hole 40: -(100,0)
  silkscreen extent -275,-275 275,275, body extent -256,-256 256,256, height 827
MY_E7.5-18mm [mil]
  round 124 hole 40: +(-150,0)
  oct 124x124 hole 40: -(150,0)
  silkscreen extent -350,-350 350,350, body extent -354,-354 354,354, height 591
MY_E8.4-15mm [mil]
  oct 60x60 hole 39.37: 1(-300,0) 2(300,0)
  silkscreen extent -355,-160 355,160, body extent -356,-158 352,157, height 591
"RES 0805_2012" [mm] "Chip Resistor, 2-Leads, Body 2.00x1.25mm, IPC Medium Density"
  rect 1.15x1.35 smd: 1(-0.875,0) 2(0.875,0)
  silkscreen extent -1.7,-0.9 1.7,0.9, body extent -1,-0.62 1,0.63, height 0.6
SOD-123 [mm] "SOD, 2-Leads, Body 1.55x3.70mm, IPC Medium Density"
  rect 0.9x0.95 smd: 1(-1.575,0) 2(1.575,0)
  silkscreen extent -2.3,-0.92 2.41,0.92, body extent -1.86,-0.78 1.86,0.77, height 1.35
SOIC127P599X175-8N [mm]
  rrect25% 1.97x0.6 smd: 1(-2.47,1.905) 2(-2.47,0.635) 3(-2.47,-0.635) 4(-2.47,-1.905) 5(2.47,-1.905) 6(2.47,-0.635) 7(2.47,0.635) 8(2.47,1.905)
  silkscreen extent -4.14,-2.52 1.95,2.52, body extent -3,-2.45 3,2.45, height 1.75
SOIC127P600X175-8N [mm]
  rrect25% 1.97x0.6 smd: 1(-2.475,1.905) 2(-2.475,0.635) 3(-2.475,-0.635) 4(-2.475,-1.905) 5(2.475,-1.905) 6(2.475,-0.635) 7(2.475,0.635) 8(2.475,1.905)
  silkscreen extent -4.47,-2.52 2,2.6, body extent -3,-2.45 3,2.45, height 1.75
TL494-PWM-MODULE [mm]
  round 1.8 hole 1: 1(0,8.89)
  rect 1.8x1.8 / inner round 1.8 / far side rect 1.8x1.8 hole 1: 2(0,6.35) 3(0,3.81) 4(0,1.27) 5(0,-1.27) 6(0,-3.81) 7(0,-6.35) 8(0,-8.89)
  silkscreen extent -6.54,-27.41 3.25,27.5, body extent -11.8,-27.5 7.47,27.5, height 47
TO254P1054X470X1955-3 [mm]
  rect 1.86x1.86 / inner round 1.86 / far side rect 1.86x1.86 hole 1.24: 1(-2.54,0)
  round 1.86 hole 1.24: 2(0,0) 3(2.54,0)
  silkscreen extent -5.27,-2.64 5.27,2.86, body extent -5.08,-1.84 5.08,2.86, height 19.56
TO254P1054X470X2600-3 [mm]
  rect 1.86x1.86 / inner round 1.86 / far side rect 1.86x1.86 hole 1.24: 1(0,0)
  round 1.86 hole 1.24: 2(2.54,0) 3(5.08,0)
  silkscreen extent -3.41,-1.8 7.81,2.9, body extent -2.54,-1.68 7.62,2.67, height 20.4
TO92127P520H660-3 [mm]
  oval 1.1x2.2 hole 0.83: 1(-1.27,-0.612) 2(0,-0.612) 3(1.27,-0.612)
  silkscreen extent -2.6,-2.7 2.6,2.19, body extent -2.41,-1.84 2.41,1.84, height 7.87
TO92127P521H735-3 [mm]
  oval 1.07x2.14 hole 0.85: 1(-1.27,-0.775) 2(0,-0.775) 3(1.27,-0.775)
  silkscreen extent -3.5,-2.08 2.6,2.04, body extent -2.38,-2.39 2.42,1.54, height 8
TRIM_3296W-1-502 [mm]
  rect 1.218x1.218 / inner round 1.218 / far side rect 1.218x1.218 hole 0.71: 1(-2.54,0)
  round 1.218 hole 0.71: 2(0,0) 3(2.54,0)
  silkscreen extent -5.35,-2.41 4.76,2.42, body extent -4.76,-2.41 4.76,2.42, height 11.55
VALCON_VH396-02S-010 [mm]
  rect 2.625x2.625 / inner round 2.625 / far side rect 2.625x2.625 hole 1.75: 01(-1.98,0)
  round 2.625 hole 1.75: 02(1.98,0)
  silkscreen extent -4.7,-4.9 3.96,3.75, body extent -3.96,-4.9 3.96,3.75, height 10.9
VISH-TO-220AB-3 [mm] "FM, 3-Leads, Body 10.55x4.65mm, Pitch 2.54mm"
  rect 1.7x1.7 hole 1.1: 1(0,2.54)
  round 1.7 hole 1.1: 2(0,0) 3(0,-2.54)
  silkscreen extent -1.77,-5.3 2.94,6.07, body extent -1.74,-5.28 2.91,5.28, height 19.31
WE-CMBNC_XS_7448010911 [mm]
  round 1.65 hole 1.1: 1(-5,-2.25) 2(5,-2.25) 3(5,2.25) 4(-5,2.25)
  silkscreen extent -7.1,-3.85 7.1,3.85, body extent -6.24,-3.5 6.24,3.5, height 13.11
WIRE-SHUNT [mm] "Constantan resistance sampling resistor 20mOhm"
  round 3 hole 1.3 mask+0.05: 1(-5,0) 2(5,0)
  silkscreen extent -3.17,-0.25 3.18,0.36, body extent -5.5,-0.49 5.5,0.51, height 12.5
XDCR_ACS758 [mm]
  rect 1.5x1.5 / inner round 1.5 / far side rect 1.5x1.5 hole 0.8: 1(-1.91,0)
  round 1.5 hole 0.8: 2(0,0) 3(1.91,0)
  round 0.8 hole 0.5: 4(1.2,21.8) 4(1.2,20.75) 4(2,22.7) 4(2,20.13) 4(3,23) 4(3,19.8) 4(4.33,23) 4(4.33,19.8) 4(5.66,23) 4(5.66,19.8) 4(6.99,19.8) 4(6.99,23) 4(8,20.13) 4(8.15,22.7) 4(8.8,20.75) 4(8.8,21.8) 5(-8.8,20.75) 5(-8.8,21.8) 5(-8,20.13) 5(-8,22.7) 5(-7,19.8) 5(-7,23) 5(-5.67,23) 5(-5.67,19.8) 5(-4.34,23) 5(-4.34,19.8) 5(-3.01,23) 5(-3.01,19.8) 5(-2,20.13) 5(-1.85,22.7) 5(-1.2,21.8) 5(-1.2,20.75)
  oval 9x4.5 hole 2 slot 6 at 0 deg: 4(5,21.4) 5(-5,21.4)
  silkscreen extent -7,3.02 7,18.76, body extent -7,-0.4 7,22.19, height 7.1
"YAGEO RES 0805_2012" [mm] "Chip Resistor, 2-Leads, Body 2.00x1.25mm"
  rect 0.9x1.2 smd: 1(-1.05,0) 2(1.05,0)
  silkscreen extent -1.7,-0.8 1.7,0.8, body extent -1,-0.62 1,0.63, height 0.6

## Part data
C1 C2 C5 C7 C9 C14: library part "Cap ceramic", "None polar capacitor", ASiD Part Number=C-AS, Volte=50v
C3 C16 C17 C19 C20: library part RDER73A103K2K1H03B, "Lead Capacitor X7R_EIA_ with Capacitance: 10000pF and Rated Voltage: 1000Vdc", Package="Radial Murata", Availability=Unavailable, MF=Murata, MP=RDER73A103K2K1H03B, Price=None, SnapEDA_Link=https://www.snapeda.com/parts/RDER73A103K2K1H03B/Murata/view-part/4546147/?ref=snap
C4 C6 C8 C21 C24 C25: library part "Cap Pol", "Polar capacitor", ASiD Part Number=C-AS, Volte=25v
C10 C11: library part "Cap Pol", "Polar capacitor", ASiD Part Number=C-AS, Volte=450V
C12 C15: library part FG26X7R1E106KRT06, "10 ÂµF Â±10% 25V Ceramic Capacitor X7R Radial", Package="Radial TDK", Check_prices=https://www.snapeda.com/parts/FG26X7R1E106KRT06/TDK/view-part/?ref=eda, MF=TDK, MP=FG26X7R1E106KRT06, SnapEDA_Link=https://www.snapeda.com/parts/FG26X7R1E106KRT06/TDK/view-part/?ref=snap
C13: library part "Cap ceramic", "None polar capacitor", ASiD Part Number=C-AS, Volte=275VAC
C18 C42: library part ECWFD2J225K, Package=None, Availability=Unavailable, MP=ECWFD2J225K, Price=None
C22 C23 C26 C27 C28 C29 C30 C32 C34 C35 C37 C41: library part 08055G104ZAT2A, "CAP CER 0.1UF 50V Y5V 0805", Device Package="0805 (2012 Metric)", Manufacturer="AVX Corporation", Operating Temperature="-30°C ~ 85°C", Supplier Part Number 1=478-1421-1-ND, Temperature Coefficient="Y5V (F)", Tolerance="-20%, +80%", Voltage - Rated=50V, Applications="General Purpose", Capacitance=0.1µF, ComponentLink1Description=Datasheet, ComponentLink1URL=http://datasheets.avx.com/Y5V.pdf, ComponentLink2Description="DigiKey Link", ComponentLink2URL=http://digikey.com/product-detail/en/avx-corporation/08055G104ZAT2A/478-1421-1-ND/564453, id=137, LastUpdated=2020-09-02T01:04:40.390, Lifecycle Status=Active, Minimum Order=1, Mounting Type="Surface Mount, MLCC", Package / Case="0805 (2012 Metric)", Packaging=TapeAndReel, PartId=3166, Part Number=08055G104ZAT2A, Part Status=Active, Price=0.02, Series=-, Size / Dimension="0.079\" L x 0.049\" W (2.01mm x 1.25mm)", Supplier 1=DigiKey, Thickness (Max)="0.028\" (0.71mm)"
C31 C33 C36 C39: library part LD05YD106KAB2A, "CAP CER 10UF 16V X5R 0805", Device Package="0805 (2012 Metric)", Manufacturer="AVX Corporation", Operating Temperature="-55°C ~ 85°C", Supplier Part Number 1=478-10966-1-ND, Temperature Coefficient=X5R, Tolerance=±10%, Voltage - Rated=16V, Applications="General Purpose", Capacitance=10µF, ComponentLink1Description=Datasheet, ComponentLink1URL=http://datasheets.avx.com/LD-Series.pdf, ComponentLink2Description="DigiKey Link", ComponentLink2URL=http://digikey.com/product-detail/en/avx-corporation/LD05YD106KAB2A/478-10966-1-ND/7536378, id=3673, LastUpdated=2020-09-02T01:04:07.450, Lifecycle Status=Active, Minimum Order=1, Mounting Type="Surface Mount, MLCC", Package / Case="0805 (2012 Metric)", Packaging=TapeAndReel, PartId=18000, Part Number=LD05YD106KAB2A, Part Status=Active, Price=4.81, Series=LD, Size / Dimension="0.079\" L x 0.049\" W (2.01mm x 1.25mm)", Supplier 1=DigiKey, Thickness (Max)="0.055\" (1.40mm)"
C38: library part CC0805KRNPO0BN101, "CAP CER 100PF 100V C0G/NPO 0805", Device Package="0805 (2012 Metric)", Manufacturer=Yageo, Operating Temperature="-55°C ~ 125°C", Supplier Part Number 1=13-CC0805KRNPO0BN101CT-ND, Temperature Coefficient="C0G, NP0", Tolerance=±10%, Voltage - Rated=100V, Applications="General Purpose", Capacitance="100 pF", ComponentLink1Description=Datasheet, ComponentLink1URL=https://www.yageo.com/upload/media/product/productsearch/datasheet/mlcc/UPY-NP0X7R_MV_100-to-630V_25.pdf, ComponentLink2Description="DigiKey Link", ComponentLink2URL=https://www.digikey.com/en/products/detail/yageo/CC0805KRNPO0BN101/11490950, id=9628, LastUpdated=2023-07-15T19:09:42.623, Lifecycle Status=Active, Minimum Order=1, Mounting Type="Surface Mount, MLCC", Package / Case="0805 (2012 Metric)", Packaging=TapeAndReel, PartId=55510, Part Number=CC0805KRNPO0BN101, Part Status=Active, Price=0.01, Series=CC, Size / Dimension="0.079\" L x 0.049\" W (2.00mm x 1.25mm)", Supplier 1=DigiKey, Thickness (Max)="0.028\" (0.70mm)"
C40: library part CS0805KRX7RBBB102, "CAP CER 1000PF 500V X7R 0805", Device Package="0805 (2012 Metric)", Manufacturer=Yageo, Operating Temperature="-55°C ~ 125°C", Supplier Part Number 1=311-3593-1-ND, Temperature Coefficient=X7R, Tolerance=±10%, Voltage - Rated=500V, Applications="Boardflex Sensitive", Capacitance="1000 pF", ComponentLink1Description=Datasheet, ComponentLink1URL=http://www.yageo.com/NewPortal/yageodocoutput?fileName=/pdf/MLCC/UPY-ST_NPOX7R_16V-to-3KV_5.pdf, ComponentLink2Description="DigiKey Link", ComponentLink2URL=https://www.digikey.com/en/products/detail/yageo/CS0805KRX7RBBB102/6097992, Features="Soft Termination", id=67, LastUpdated=2023-01-03T20:10:55.223, Lifecycle Status=Active, Minimum Order=1, Mounting Type="Surface Mount, MLCC", Package / Case="0805 (2012 Metric)", Packaging=TapeAndReel, PartId=2739, Part Number=CS0805KRX7RBBB102, Part Status=Active, Price=0.06, Series=CS, Size / Dimension="0.079\" L x 0.049\" W (2.00mm x 1.25mm)", Supplier 1=DigiKey, Thickness (Max)="0.039\" (1.00mm)"
D1: Package=None, Availability=Unavailable, MP=BZX55B20_R0G, Price=None
D2 D3 D4 D5: "75ns, 2A, 800V, High Efficient Recovery Rectifier", Package="DO-15 Taiwan Semiconductor", Availability="In Stock", Check_prices=https://www.snapeda.com/parts/HER207G/Taiwan+Semiconductor/view-part/?ref=eda, MF="Taiwan Semiconductor", MP=HER207G, Price=None, Purchase-URL=https://pricing.snapeda.com/search/part/HER207G/?ref=eda, SnapEDA_Link=https://www.snapeda.com/parts/HER207G/Taiwan+Semiconductor/view-part/?ref=snap
D6 D7 D8 D9: library part 1N5400, "3 Amp Diode", ASiD Part Number=1N5408-AS
D10 D11 D12 D13: library part 1N4007, "1 Amp Diode", ASiD Part Number=1n4007-AS
D14 D18 D21: "OPTOISOLATR 5KV TRANSISTOR 4-SMD", Current - Dc Forward (If) (Max)=50mA, Current Transfer Ratio (Max)="600% @ 5mA", Current Transfer Ratio (Min)="50% @ 5mA", Device Package="4-SMD, Gull Wing", Manufacturer="Lite-On Inc.", Operating Temperature="-30°C ~ 110°C", Supplier Device Package=4-SMD, Supplier Part Number 1=160-2038-1-ND, Voltage - Forward (Vf) (Typ)=1.2V, Voltage - Isolation=5000Vrms, Voltage - Output (Max)=35V, ComponentLink1Description=Datasheet, ComponentLink1URL=http://optoelectronics.liteon.com/upload/download/DS-70-96-0016/LTV-8X7%20series%20201610%20.pdf, ComponentLink2Description="DigiKey Link", ComponentLink2URL=http://digikey.com/product-detail/en/lite-on-inc/LTV-817S-TA/160-2038-1-ND/3711420, Current - Output / Channel=50mA, id=3, Input Type=DC, LastUpdated=2020-01-12T21:59:02.467, Lifecycle Status=Active, Minimum Order=1, Mounting Type="Surface Mount", Number Of Channels=1, Output Type=Transistor, Package / Case="4-SMD, Gull Wing", Packaging=TapeAndReel, Part Number=LTV-817S-TA, Part Status=Active, Price=0.12, Rise / Fall Time (Typ)="4µs, 3µs", Series=-, Supplier 1=DigiKey, Vce Saturation (Max)=200mV
D15 D17 D19 D22: "Diode Standard 100 V 300mA Surface Mount SOD-80 MiniMELF", Package="SOD-80-2 ON Semiconductor", Check_prices=https://www.snapeda.com/parts/LL4148/Onsemi/view-part/?ref=eda, MF=onsemi, MP=LL4148, SnapEDA_Link=https://www.snapeda.com/parts/LL4148/Onsemi/view-part/?ref=snap
D16: "DIODE SCHOTTKY 30V 2A DO214AC", Current - Average Rectified (Io)=2A, Current - Reverse Leakage @ Vr="500µA @ 30V", Manufacturer="Micro Commercial Co", Operating Temperature - Junction="-55°C ~ 125°C", Package / Case="DO-214AC, SMA", Supplier Device Package="DO-214AC (SMA)", Supplier Part Number 1=SS23-TPMSTR-ND, Voltage - DC Reverse (Vr) (Max)=30V, Voltage - Forward (Vf) (Max) @ If="550mV @ 2A", ComponentLink1Description=Datasheet, ComponentLink1URL=https://www.mccsemi.com/pdf/Products/SS22-SS210(HSMA).PDF, ComponentLink2Description="DigiKey Link", ComponentLink2URL=http://digikey.com/product-detail/en/micro-commercial-co/SS23-TP/SS23-TPMSTR-ND/2041482, Diode Type=Schottky, id=2166, LastUpdated=2023-01-02T20:53:32.833, Lifecycle Status=Active, Minimum Order=0, Mounting Type="Surface Mount", Packaging=TapeAndReel, PartId=2166, Part Number=SS23-TP, Part Status=Active, Price=0.08, Series=-, Speed="Fast Recovery =< 500ns, > 200mA (Io)", Supplier 1=DigiKey
D20: "DIODE ZENER 5.1V 500MW SOD123", Current - Reverse Leakage @ Vr="5µA @ 2V", Manufacturer="ON Semiconductor", Operating Temperature="-55°C ~ 150°C", Package / Case=SOD-123, Power - Max=500mW, Supplier Part Number 1=MMSZ5231CT1GOSCT-ND, Tolerance=±2%, Voltage - Forward (Vf) (Max) @ If="900mV @ 10mA", Voltage - Zener (Nom) (Vz)=5.1V, ComponentLink1Description=Datasheet, ComponentLink1URL=http://www.onsemi.com/pub/Collateral/MMSZ5221BT1-D.PDF, ComponentLink2Description="DigiKey Link", ComponentLink2URL=http://digikey.com/product-detail/en/on-semiconductor/MMSZ5231CT1G/MMSZ5231CT1GOSCT-ND/9086882, id=887, Impedance (Max) (Zzt)="17 Ohms", LastUpdated=2023-01-02T20:54:29.913, Lifecycle Status=Active, Minimum Order=1, Mounting Type="Surface Mount", Packaging=TapeAndReel, PartId=1662, Part Number=MMSZ5231CT1G, Part Status=Active, Price=0.09, Series=-, Supplier 1=DigiKey, Supplier Device Package=SOD-123
F1 F2: library part "Car Blade Fuse", "Mini Car Blade Fuses Zinc Auto Fuse"
HS1 HS2: "Aluminum Heatsink 150x19.7x15.6mm", Package="Heatsink Jameco Valuepro", Check_prices=https://www.snapeda.com/parts/531002B02500-R/Jameco+Benchpro/view-part/?ref=eda, MF="Jameco Valuepro", MP=531002B02500-R, SnapEDA_Link=https://www.snapeda.com/parts/531002B02500-R/Jameco+Benchpro/view-part/?ref=snap
J1: library part VH396-02S-010, "VH396 - Valcon 3.96mm 5A Wire-to-Board Straight Locking Power Connector", Package=None, Availability="In Stock", Check_prices=https://www.snapeda.com/parts/VH396-02S-010/Valcon/view-part/?ref=eda, MF=Valcon, MP=VH396-02S-010, Price=None, Purchase-URL=https://pricing.snapeda.com/search/part/VH396-02S-010/?ref=eda, SnapEDA_Link=https://www.snapeda.com/parts/VH396-02S-010/Valcon/view-part/?ref=snap
J2: library part B3P-VH(LF)(SN), "Connector Header Through Hole 3 position 0.156 (3.96mm)", Package=None, Check_prices=https://www.snapeda.com/parts/B3P-VH(LF)(SN)/JST/view-part/?ref=eda, MF="JST Sales", MP=B3P-VH(LF)(SN), SnapEDA_Link=https://www.snapeda.com/parts/B3P-VH(LF)(SN)/JST/view-part/?ref=snap
J3 J4 J5 J6: library part "Keystone 7767", "PCB Soldering Terminal Riveting Nut Welding Terminals 8*8*6.8MM M4 or M3"
J7 J8 J9 J10 J11 J12: library part B2B-XH-A(LF)(SN), "Connector Header Through Hole 2 position 0.098 (2.50mm)", Package=None, Check_prices=https://www.snapeda.com/parts/B2B-XH-A(LF)(SN)/JST+Sales+America+Inc./view-part/?ref=eda, MF="JST Sales America Inc.", MP=B2B-XH-A(LF)(SN), SnapEDA_Link=https://www.snapeda.com/parts/B2B-XH-A(LF)(SN)/JST+Sales+America+Inc./view-part/?ref=snap
J13: library part B4B-XH-AM_(LF)(SN), "Connector Header Through Hole 4 position 0.098 (2.50mm)", Package=None, Check_prices=https://www.snapeda.com/parts/B4B-XH-AM(LF)(SN)/JST/view-part/?ref=eda, MF="JST Sales", MP=B4B-XH-AM(LF)(SN), SnapEDA_Link=https://www.snapeda.com/parts/B4B-XH-AM(LF)(SN)/JST/view-part/?ref=snap
L1: library part WE-CMBNC_XS, "Common Mode Choke WE-CMBNC 11mH 0.9A R43", Package="Vertical-4 Wurth Electronics", Check_prices=https://www.snapeda.com/parts/7448010911/W%25C3%25BCrth+Elektronik+Midcom/view-part/?ref=eda, MF="WÃ¼rth Elektronik", MP=7448010911, SnapEDA_Link=https://www.snapeda.com/parts/7448010911/W%25C3%25BCrth+Elektronik+Midcom/view-part/?ref=snap
L2: library part 184125, "THT Leaded Toroidal Line Choke, 2mH, 20A", DC Resistance Max=0.225Ω, Inductance=470µH, Manufacturer="Wurth Elektronik", Manufacturer Part Number=7447010, Operating Temperature Max=105°C, Operating Temperature Min=-40°C, Rated Current=1.6A, Category="Filter Chokes", ComponentLink1Description="Website Link", ComponentLink1URL=https://www.we-online.com/redexpert/article/7447010?ad, ComponentLink2Description="Datasheet Link", ComponentLink2URL=https://www.we-online.com/redexpert/spec/7447010?ad, Height=18.5mm, Length=18.5mm, Match Code=WE-FI, Mount="Through Hole", Packaging=Tray, Width=11.6mm
LED1: library part TLLG4400, "LED; PCB ; Green; 0.63mcd; 3mm; T-1; 7mA; 1.9V; 565nm; 25deg; GaP on GaP; 20V; 20mW; -40", Package=Package, Check_prices=https://www.snapeda.com/parts/TLLG4400/Vishay/view-part/?ref=eda, MF="Vishay Semiconductor", MP=TLLG4400, SnapEDA_Link=https://www.snapeda.com/parts/TLLG4400/Vishay/view-part/?ref=snap
M1: library part "TL494 PWM CONTROLLER", "TL494 16KHz-60KHz adjustable frequency, duty. With voltage and currenct control inverter pre-driver module", Package=Package, Availability="Not in stock", Check_prices=https://www.snapeda.com/parts/EGS002/EGmicro/view-part/?ref=eda, MF=EGmicro, MP=EGS002, Price=None, SnapEDA_Link=https://www.snapeda.com/parts/EGS002/EGmicro/view-part/?ref=snap
M2: "EGS002 is a driver board specific for single phase sinusoid inverter. It uses ASIC EG8010 as control chip and IR2110S as driver chip.", Package=Package, Availability="Not in stock", Check_prices=https://www.snapeda.com/parts/EGS002/EGmicro/view-part/?ref=eda, MF=EGmicro, MP=EGS002, Price=None, SnapEDA_Link=https://www.snapeda.com/parts/EGS002/EGmicro/view-part/?ref=snap
P1: library part "Header 2", "Header, 2-Pin", ASiD Part Number="Header 2-AS"
Q1 Q2 Q3 Q4: library part CMP-2000-04997-1, "HEXFET(R) Power N-Channel MOSFET, 55 V, 110 A, -55 to 117 degC, 3-Pin TO-220AB, RoHS, Rail/Tube", Manufacturer="International Rectifier", Maximum Continuous Drain Current=110A, Maximum Drain Source Resistance=0.008Ω, Maximum Drain Source Voltage=55V, Maximum Gate Source Voltage=±20V, Maximum Gate Threshold Voltage=4V, Maximum Operating Temperature=+175degC, Maximum Power Dissipation=200W, Minimum Gate Threshold Voltage=2V, Minimum Operating Temperature=-55degC, Package Description="3-Pin Plastic (Green) Transistor Single Outline Package, 9.9 x 9.2 mm Body, 2.54 mm Pitch", Package Reference=PG-TO-220AB, Package Type=TO-220AB, Package Version=Feb-04, Typical Input Capacitance @ Vds=3247pF@25V, Category=PowerMOSFET, Channel Mode=Enhancement, Channel Type=N, Datasheet URL=http://datasheet.octopart.com/IRF3205PBF-International-Rectifier-datasheet-10898897.pdf, Datasheet Version=Jul-10, Dimensions=10.54x4.69x8.77mm, Height=8.77mm, Length=10.54mm, Manufacturer URL=http://internationalrectifier.com/, Mounting Type=ThroughHole, Number of Elements per Chip=1, Package URL=http://www.infineon.com/dgdl/bts110.pdf?folderId=db3a304412b407950112b43583c16310&fileId=db3a304412b407950112b43584326311&sId=db3a30443e3c704d013e4eb6657a2604, Pin Count=3, Transistor Configuration=Single, Transistor Material=Si, Typical Gate Charge @ Vgs=146nC@10V, Typical Turn-Off Delay Time=50ns, Typical Turn-On Delay Time=14ns, Width=4.69mm
Q5 Q6 Q7 Q8: library part CMP-2000-06467-1, "Power MOSFET, 500 V, -55 to 150 degC, 3-Pin FM, RoHS, Tape and Reel", Manufacturer=Vishay, Maximum Continuous Drain Current=8A, Maximum Drain Source Resistance=0.85Ω, Maximum Drain Source Voltage=500V, Maximum Gate Source Voltage=±20V, Maximum Operating Temperature=+150°C, Maximum Power Dissipation=125W, Minimum Gate Threshold Voltage=2V, Minimum Operating Temperature=-55°C, Package Description="3-Pin Flange Mount, Body 10.275 x 4.45 mm, Pitch 2.54 mm", Package Reference=TO-220AB-3, Package Type=TO-220AB, Typical Input Capacitance @ Vds=1300pF@25V, Category=PowerMOSFET, Channel Mode=Enhancement, Channel Type=N, Datasheet URL=https://datasheet.ciiva.com/26791/irf840pbf-26791500.pdf, Datasheet Version="Rev. C, 03/2011", Dimensions=10.41x4.7x9.01mm, Height=9.01mm, Length=10.41mm, Manufacturer URL=http://www.vishay.com/, Mounting Technology=ThroughHole, Mounting Type=ThroughHole, Number of Elements per Chip=1, Package URL=http://www.vishay.com/docs/71195/to220ab.pdf, Pin Count=3, Typical Gate Charge @ Vgs=63nC@10V, Typical Turn-Off Delay Time=49ns, Typical Turn-On Delay Time=14ns, Width=4.7mm
Q9 Q10 Q11 Q12 Q14 Q15: "N-Channel 40 V 13A (Ta), 50A (Tc) 2.3W (Ta), 50W (Tc) Surface Mount TO-252 (DPAK)", Package=None, Check_prices=https://www.snapeda.com/parts/AOD4184A/Alpha+%2526+Omega+Semiconductor+Inc./view-part/?ref=eda, MF="Alpha & Omega Semiconductor Inc.", MP=AOD4184A, SnapEDA_Link=https://www.snapeda.com/parts/AOD4184A/Alpha+%2526+Omega+Semiconductor+Inc./view-part/?ref=snap
Q13: "TRANS NPN 25V 1.5A SOT23", Current - Collector (Ic) (Max)="1.5 A", Current - Collector Cutoff (Max)=100nA, DC Current Gain (Hfe) (Min) @ Ic, Vce="120 @ 100mA, 1V", Frequency - Transition=100MHz, Manufacturer="Micro Commercial Co", Operating Temperature="-55°C ~ 150°C (TJ)", Package / Case="TO-236-3, SC-59, SOT-23-3", Power - Max="625 mW", Supplier Device Package=SOT-23, Supplier Part Number 1=MMSS8050-L-TPMSCT-ND, Voltage - Collector Emitter Breakdown (Max)="25 V", ComponentLink1Description=Datasheet, ComponentLink1URL=https://www.mccsemi.com/pdf/Products/MMSS8050(SOT-23).pdf, ComponentLink2Description="DigiKey Link", ComponentLink2URL=https://www.digikey.com/en/products/detail/micro-commercial-co/MMSS8050-L-TP/2827197, id=278, LastUpdated=2023-01-02T21:11:10.217, Lifecycle Status=Active, Minimum Order=1, Mounting Type="Surface Mount", Packaging=TapeAndReel, PartId=278, Part Number=MMSS8050-L-TP, Part Status=Active, Price=0.02, Series=-, Supplier 1=DigiKey, Transistor Type=NPN, Vce Saturation (Max) @ Ib, Ic="500mV @ 80mA, 800mA"
Q16: "MOSFET N-CH 30V 3.6A SOT23", Current - Continuous Drain (Id) @ 25°C="3.6A (Ta)", Drain To Source Voltage (Vdss)="30 V", Drive Voltage (Max Rds On,  Min Rds On)="4.5V, 10V", Input Capacitance (Ciss) (Max) @ Vds="495 pF @ 15 V", Manufacturer="Diodes Incorporated", Operating Temperature="-55°C ~ 150°C (TJ)", Package / Case="TO-236-3, SC-59, SOT-23-3", Power Dissipation (Max)="770mW (Ta)", Supplier Device Package=SOT-23-3, Supplier Part Number 1=DMG3406L-7DICT-ND, ComponentLink1Description=Datasheet, ComponentLink1URL=https://www.diodes.com/assets/Datasheets/DMG3406L.pdf, ComponentLink2Description="DigiKey Link", ComponentLink2URL=https://www.digikey.com/en/products/detail/diodes-incorporated/DMG3406L-7/5223203, FET Type=N-Channel, Gate Charge (Qg) (Max) @ Vgs="11.2 nC @ 10 V", id=104, LastUpdated=2023-01-02T21:04:51.250, Lifecycle Status=Active, Minimum Order=1, Mounting Type="Surface Mount", Packaging=TapeAndReel, Part Number=DMG3406L-7, Part Status=Active, Price=0.05, Rds On (Max) @ Id, Vgs="50mOhm @ 3.6A, 10V", Series=-, Supplier 1=DigiKey, Technology="MOSFET (Metal Oxide)", Vgs (Max)=±20V, Vgs(Th) (Max) @ Id="2V @ 250µA"
R1 R3 R4 R5 R7 R8 R9 R10 R11 R12 R13 R14 R15: library part Res, "Standard resistor", ASiD Part Number=Res-AS
  R4: Wattage=0.5W
R2 R6: library part Res, "2W", ASiD Part Number=Res-AS, Wattage=2W
R16 R23 R35: library part CRCW08051K00FKEA, "RES SMD 1K OHM 1% 1/8W 0805", Device Package="0805 (2012 Metric)", Manufacturer="Vishay Dale", Operating Temperature="-55°C ~ 155°C", Power (Watts)="0.125W, 1/8W", Ratings=AEC-Q200, Supplier Device Package=0805, Supplier Part Number 1=541-1.00KCCT-ND, Temperature Coefficient=±100ppm/°C, Tolerance=±1%, ComponentLink1Description=Datasheet, ComponentLink1URL=http://www.vishay.com/docs/20035/dcrcwe3.pdf, ComponentLink2Description="DigiKey Link", ComponentLink2URL=http://digikey.com/product-detail/en/vishay-dale/CRCW08051K00FKEA/541-1.00KCCT-ND/1180783, Composition="Thick Film", Features="Automotive AEC-Q200", Height - Seated (Max)="0.020\" (0.50mm)", id=200, LastUpdated=2023-01-02T20:44:50.643, Lifecycle Status=Active, Minimum Order=1, Number Of Terminations=2, Package / Case="0805 (2012 Metric)", Packaging=TapeAndReel, PartId=28103, Part Number=CRCW08051K00FKEA, Part Status=Active, Price=0.01, Resistance="1 kOhms", Series=CRCW, Size / Dimension="0.079\" L x 0.049\" W (2.00mm x 1.25mm)", Supplier 1=DigiKey
R17 R27 R37: library part RC0805FR-07100RP, "RES SMD 100 OHM 1% 1/8W 0805", Device Package="0805 (2012 Metric)", Manufacturer=Yageo, Operating Temperature="-55°C ~ 155°C", Power (Watts)="0.125W, 1/8W", Supplier Device Package=0805, Supplier Part Number 1=YAG1318CT-ND, Temperature Coefficient=±150ppm/°C, Tolerance=±1%, ComponentLink1Description=Datasheet, ComponentLink1URL=http://www.yageo.com/NewPortal/yageodocoutput?fileName=/pdf/R-Chip/PYu-RC_51_RoHS_P_0.pdf, ComponentLink2Description="DigiKey Link", ComponentLink2URL=https://www.digikey.com/en/products/detail/yageo/RC0805FR-07100RP/4935333, Composition="Thick Film", Features="Moisture Resistant", Height - Seated (Max)="0.024\" (0.60mm)", id=489, LastUpdated=2023-01-02T20:44:48.083, Lifecycle Status=Active, Minimum Order=1, Number Of Terminations=2, Package / Case="0805 (2012 Metric)", Packaging=TapeAndReel, PartId=28669, Part Number=RC0805FR-07100RP, Part Status=Active, Price=0.01, Resistance="100 Ohms", Series="RC-P Lead Free", Size / Dimension="0.079\" L x 0.049\" W (2.00mm x 1.25mm)", Supplier 1=DigiKey
R18 R28 R34 R38: library part RC0805FR-074K7P, "RES SMD 4.7K OHM 1% 1/8W 0805", Device Package="0805 (2012 Metric)", Manufacturer=Yageo, Operating Temperature="-55°C ~ 155°C", Power (Watts)="0.125W, 1/8W", Supplier Device Package=0805, Supplier Part Number 1=YAG1325CT-ND, Temperature Coefficient=±100ppm/°C, Tolerance=±1%, ComponentLink1Description=Datasheet, ComponentLink1URL=http://www.yageo.com/NewPortal/yageodocoutput?fileName=/pdf/R-Chip/PYu-RC_51_RoHS_P_0.pdf, ComponentLink2Description="DigiKey Link", ComponentLink2URL=https://www.digikey.com/en/products/detail/yageo/RC0805FR-074K7P/4935340, Composition="Thick Film", Features="Moisture Resistant", Height - Seated (Max)="0.024\" (0.60mm)", id=105, LastUpdated=2023-01-02T20:44:51.553, Lifecycle Status=Active, Minimum Order=1, Number Of Terminations=2, Package / Case="0805 (2012 Metric)", Packaging=TapeAndReel, PartId=27895, Part Number=RC0805FR-074K7P, Part Status=Active, Price=0.01, Resistance="4.7 kOhms", Series="RC-P Lead Free", Size / Dimension="0.079\" L x 0.049\" W (2.00mm x 1.25mm)", Supplier 1=DigiKey
R19 R20 R21 R24 R25 R26 R33 R36: library part RT0805CRE0710KL, "RES SMD 10K OHM 0.25% 1/8W 0805", Device Package="0805 (2012 Metric)", Manufacturer=Yageo, Operating Temperature="-55°C ~ 155°C", Power (Watts)="0.125W, 1/8W", Supplier Device Package=0805, Supplier Part Number 1=13-RT0805CRE0710KLCT-ND, Temperature Coefficient=±50ppm/°C, Tolerance=±0.25%, ComponentLink1Description=Datasheet, ComponentLink1URL=https://www.yageo.com/upload/media/product/app/datasheet/rchip/pyu-rt_1-to-0.01_rohs_l.pdf, ComponentLink2Description="DigiKey Link", ComponentLink2URL=https://www.digikey.com/en/products/detail/yageo/RT0805CRE0710KL/1077248, Composition="Thin Film", Height - Seated (Max)="0.024\" (0.60mm)", id=19669, LastUpdated=2024-07-25T09:20:04.120, Lifecycle Status=Active, Minimum Order=1, Number Of Terminations=2, Package / Case="0805 (2012 Metric)", Packaging=TapeAndReel, PartId=88249, Part Number=RT0805CRE0710KL, Price=0.05, Resistance="10 kOhms", Series=RT, Size / Dimension="0.079\" L x 0.049\" W (2.00mm x 1.25mm)", Supplier 1=DigiKey